# Altium PCB PCB_RFID_Altium.pcbdoc
Units mm, origin at the board's own origin, x right, y up, seen from the top; angles counter-clockwise.
Board outline 159.52 x 95.12 mm, 2 copper layers (Top Layer, Bottom Layer); 3 components, 34 nets, 54 pads, 0 vias.
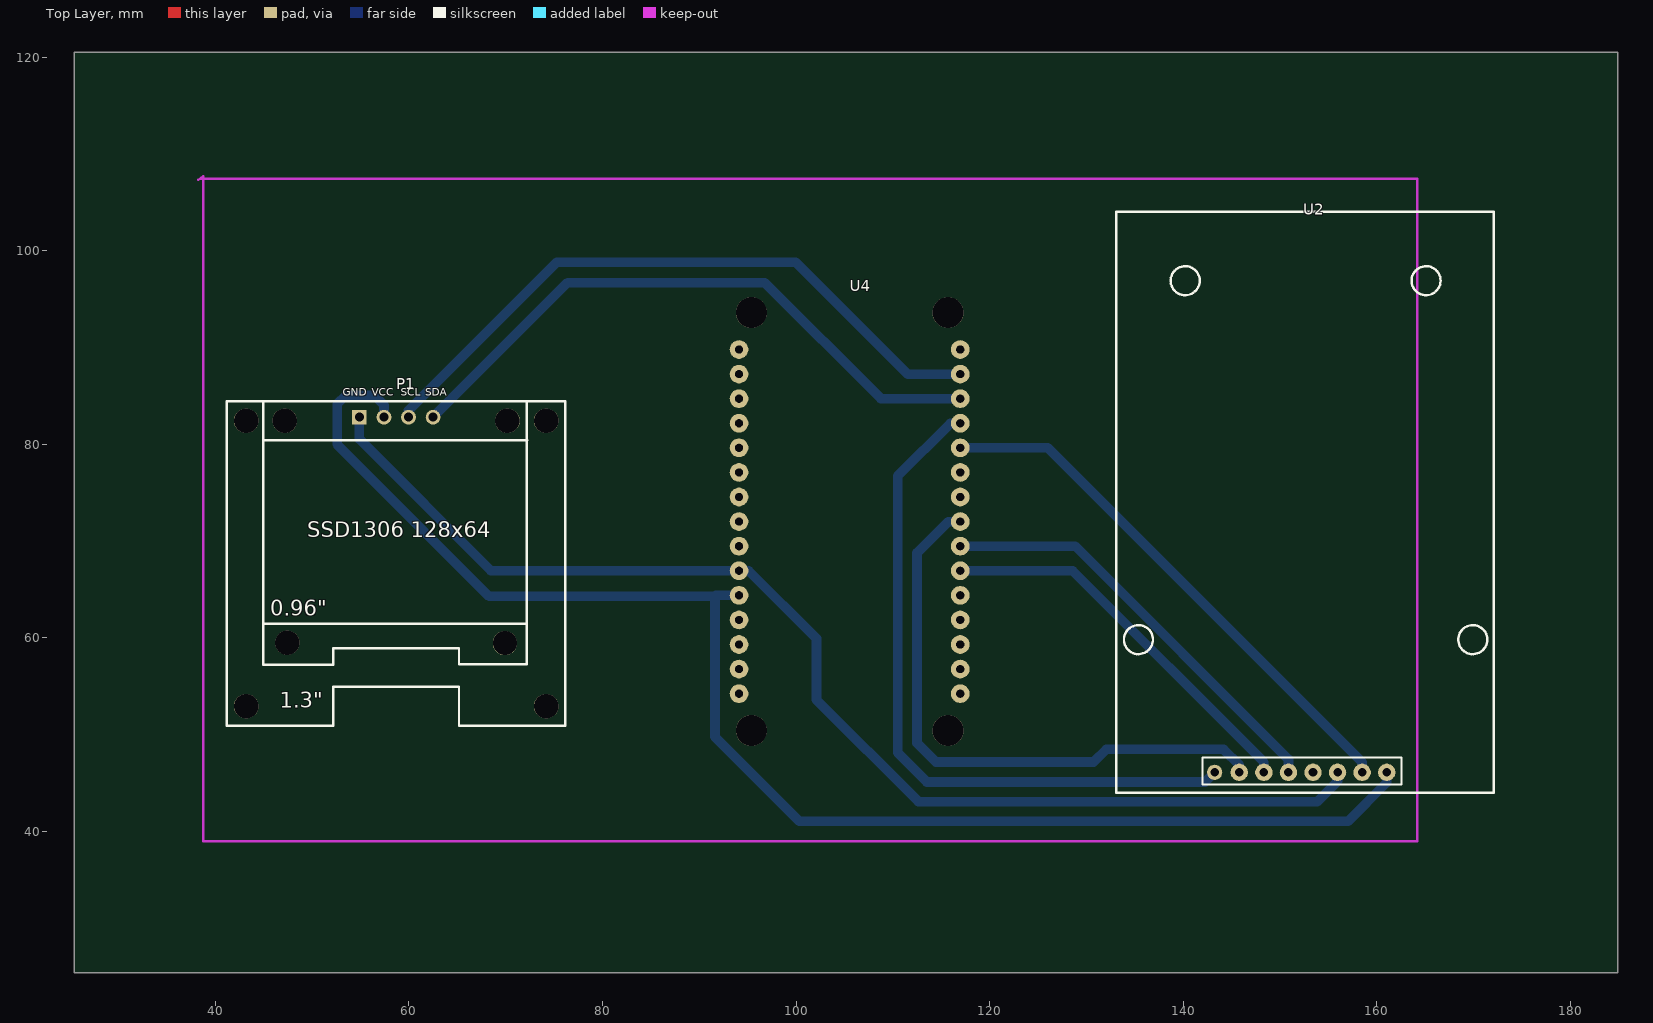
[diagram p0: Top Layer view]
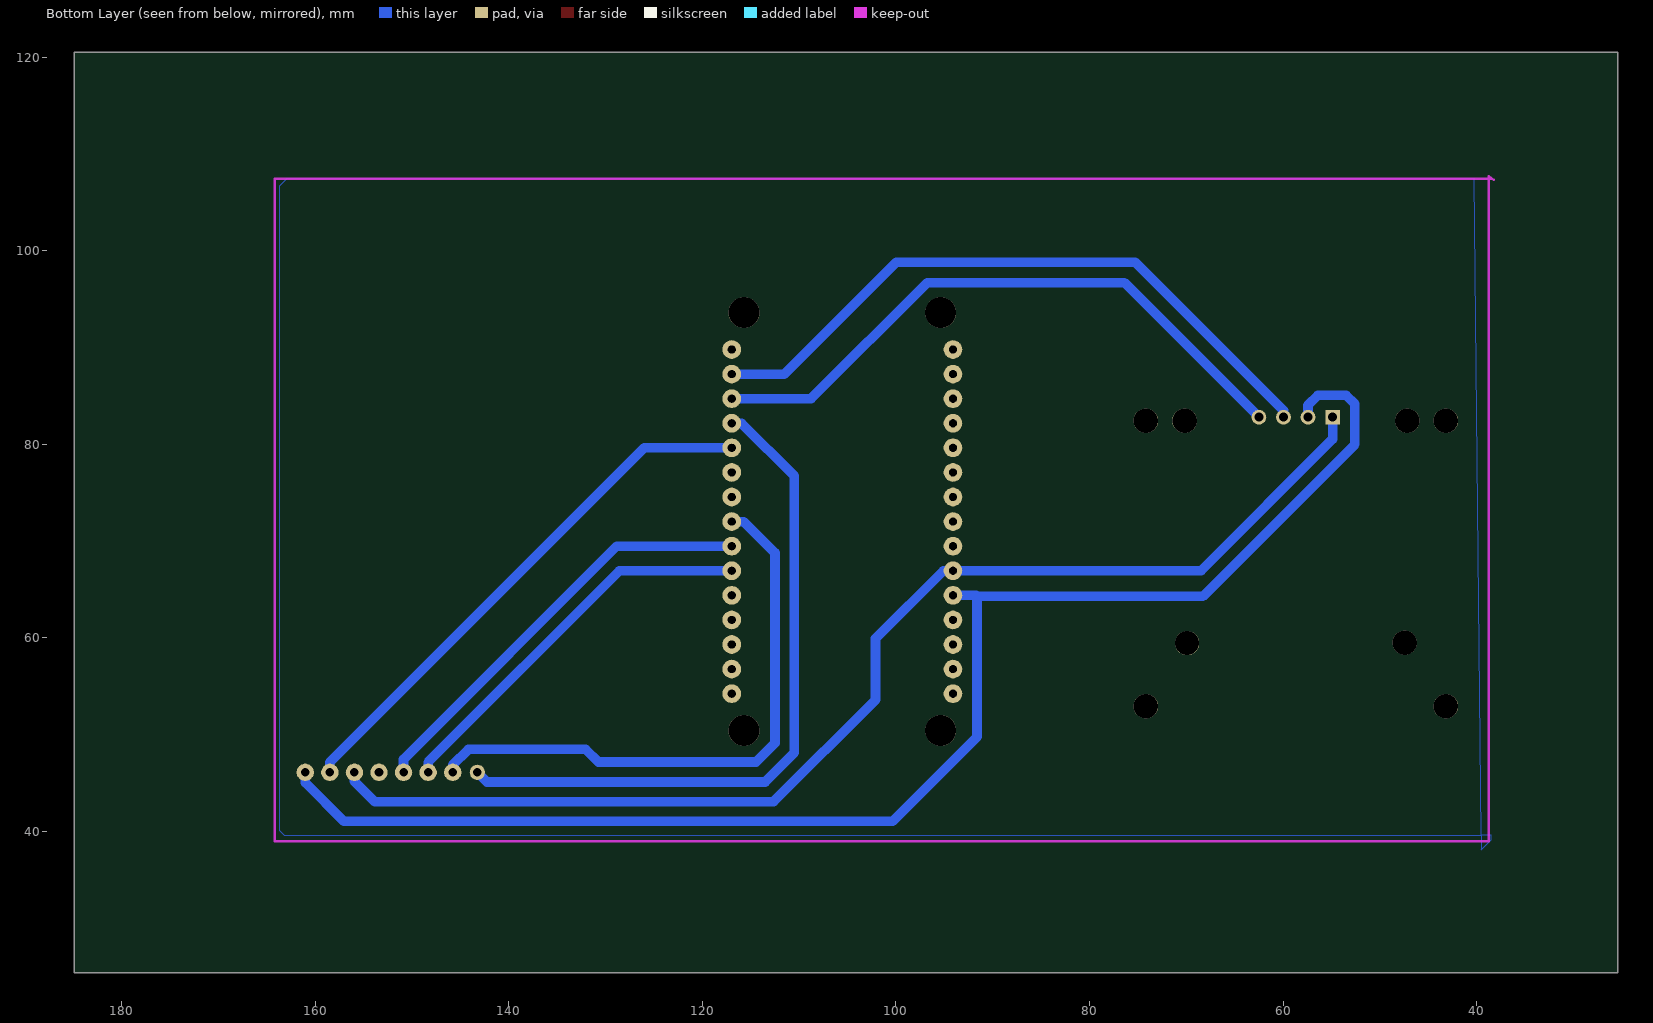
[diagram p1: Bottom Layer view, seen from below]

## Layer stack, top to bottom
Top Layer: signal copper (thickness not stored)
Dielectric: dielectric 0.32, FR-4, Dk 4.8
Bottom Layer: signal copper (thickness not stored)

## Board outline
184.923,25.4 25.4,25.4 25.4,120.523 184.923,120.523

## Components (designator, comment, footprint, x,y, rotation, side; value= is the part's Value field where it differs from the comment)
P1 "COIN_OLED_Display_I2C" "0.96 AND 1.3 I2C OLED SSD1306 COIN" 58.674,82.931 r0 top
U2 "MFRC522" MFRC522 133.096,104.013 r0 top
U4 "ESP8266" ESP12E_DEVKIT-V1 105.537,72.009 r0 top

## Footprints (in the part's own frame and the unit in brackets; to place one, negate y for a bottom-side part, rotate by r counter-clockwise, add the part's x,y. Pads: shape width x height; smd on the part's side, far side on the other; paste and mask are expansions set on the pad)
"0.96 AND 1.3 I2C OLED SSD1306 COIN" [mil]
  rect 60x60 hole 36 paste+0 mask+2: 1(-149.44,-5.18)
  round 60 hole 36 paste+0 mask+2: 2(-49.4,-5.2) 3(50.6,-5.2) 4(150.6,-5.2)
  round 100 hole 100 unplated paste+0: ""(-610.23,-1181.1) ""(-610.23,-19.69) ""(-452.75,-19.69) ""(452.76,-19.69) ""(610.24,-1181.1) ""(610.24,-19.69)
  round 98.43 hole 98.43 unplated paste+0: ""(-442.52,-922.84) ""(442.52,-924.41)
  silkscreen extent -689,-1260 689,59
ESP12E_DEVKIT-V1 [mil]
  round 76 hole 31.5 slot 31.7 at 0 deg paste+0 mask+4: 1(450,-700) 2(450,-600) 3(450,-500) 4(450,-400) 5(450,-300) 6(450,-200) 7(450,-100) 8(450,0) 9(450,100) 10(450,200) 11(450,300) 12(450,400) 13(450,500) 14(450,600) 15(450,700) 16(-450,700) 17(-450,600) 18(-450,500) 19(-450,400) 20(-450,300) 21(-450,200) 22(-450,100) 23(-450,0) 24(-450,-100) 25(-450,-200) 26(-450,-300) 27(-450,-400) 28(-450,-500) 29(-450,-600) 30(-450,-700)
  round 125.98 hole 125.98 unplated paste+0: ""(-400,-850) ""(-400,850) ""(400,-850) ""(400,850)
MFRC522 [mil]
  round 62 hole 35 paste+0 mask+4: 1(400,-2280)
  round 70.87 hole 35 paste+0 mask+4: 2(500,-2280) 3(600,-2280) 4(700,-2280) 5(800,-2280) 6(900,-2280) 7(1000,-2280) 8(1100,-2280)
  silkscreen extent 0,-2362 1535,0

## Nets (pads, with @x,y where several pads share a name; then routed paths per layer and width w, separated by ;. In a path a pad name is that pad's centre, name@x,y a point inside that pad or via, vN(x,y) a via of type N, cw(c..) or ccw(c..) an arc to the next point about the centre after c; other vN are vias at no path point)
GND: P1.1 U2.6 U4.25 | length 124.4
  Bottom Layer w1: P1.1 54.878,80.537 68.486,66.929 U4.25 95.098,66.929 102.107,59.921 102.107,53.595 112.636,43.065 153.858,43.065 155.956,45.163 U2.6
P1_3: P1.3 U4.14 | length 68.8
  Bottom Layer w1: P1.3 59.959,83.488 75.293,98.822 99.959,98.822 111.532,87.249 U4.14
P1_4: P1.4 U4.13 | length 65.2
  Bottom Layer w1: P1.4 76.401,96.701 96.765,96.701 108.756,84.709 U4.13
S$76: 
S$78: 
S$80: 
U2_1: U2.1 U4.12 | length 71.7
  Bottom Layer w1: U4.12 115.957,82.169 110.499,76.712 110.499,48.126 113.522,45.104 142.259,45.104 U2.1
U2_2: U2.2 U4.8 | length 61.5
  Bottom Layer w1: U4.8 115.733,72.009 112.506,68.781 112.506,49.124 114.456,47.174 130.743,47.174 132.053,48.483 144.172,48.483 145.796,46.859 U2.2
U2_3: U2.3 U4.6 | length 40.6
  Bottom Layer w1: U4.6 128.557,66.929 148.336,47.15 U2.3
U2_4: U2.4 U4.7 | length 44.4
  Bottom Layer w1: U4.7 128.849,69.469 150.876,47.442 U2.4
U2_5: U2.5
U2_7: U2.7 U4.11 | length 56
  Bottom Layer w1: U4.11 126.017,79.629 158.496,47.15 U2.7
U4_1: U4.1
U4_2: U4.2
U4_3: U4.3
U4_4: U4.4
U4_5: U4.5
U4_9: U4.9
U4_10: U4.10
U4_15: U4.15
U4_16: U4.16
U4_17: U4.17
U4_18: U4.18
U4_19: U4.19
U4_20: U4.20
U4_21: U4.21
U4_22: U4.22
U4_23: U4.23
U4_24: U4.24
U4_27: U4.27
U4_28: U4.28
U4_29: U4.29
U4_30: U4.30
VCC: P1.2 U2.8 U4.26 | length 149.4
  Bottom Layer w1: P1.2 57.419,84.041 56.397,85.064 53.493,85.064 52.589,84.16 52.589,79.995 68.299,64.285 91.63,64.285 ; U4.26 91.733,64.389 91.63,64.285 ; U2.8 161.036,45.032 157.047,41.043 100.358,41.043 91.63,49.771 91.63,64.285
pads on no net: P1. U4.

## Polygon pours and split planes (outlines as drawn)
GND on Bottom Layer (solid): 39.514,39.624 39.497,38.1 38.481,39.116 38.481,39.624 39.514,39.624
GND on Bottom Layer (solid): 163.703,40.132 163.195,39.624 39.514,39.624 40.259,107.442 162.941,107.442 163.703,106.68 163.703,40.132

## Text inside footprints (layer, text, board x,y; h text height)
P1: Top Overlay "VCC" at 56.174,85.031 h0.8; Top Overlay "GND" at 53.174,85.031 h0.8; Top Overlay "SCL" at 59.174,85.031 h0.8; Top Overlay "SDA" at 61.674,85.031 h0.8; Top Overlay "SSD1306 128x64" at 49.474,70.399 h1.6; Top Overlay "0.96\"" at 45.674,62.258 h1.6; Top Overlay "1.3\"" at 46.672,52.761 h1.6
U4: Document "AD0" at 95.377,89.789 h0.81; Document "RSV" at 95.377,87.249 h0.81; Document "RSV" at 95.377,84.709 h0.81; Document "SD3" at 95.377,82.169 h0.81; Document "SD2" at 95.377,79.629 h0.81; Document "SD1" at 95.377,77.089 h0.81; Document "CMD" at 95.377,74.549 h0.81; Document "SD0" at 95.377,72.009 h0.81; Document "CLK" at 95.377,69.469 h0.81; Document "GND" at 95.377,66.929 h0.81; Document "3V3" at 95.377,64.389 h0.81; Document "EN" at 95.377,61.849 h0.81; Document "RST" at 95.377,59.309 h0.81; Document "GND" at 95.377,56.769 h0.81; Document "VIN" at 95.377,54.229 h0.81; Document "3V3" at 113.502,54.229 h0.81; Document "GND" at 113.502,56.769 h0.81; Document "TX" at 114.234,59.309 h0.81; Document "RX" at 114.234,61.849 h0.81; Document "D8" at 113.502,64.389 h0.81; Document "D7" at 113.502,66.929 h0.81; Document "D6" at 113.502,69.469 h0.81; Document "D5" at 113.502,72.009 h0.81; Document "GND" at 113.502,74.549 h0.81; Document "3V3" at 113.502,77.089 h0.81; Document "D4" at 113.502,79.629 h0.81; Document "D3" at 113.502,82.169 h0.81; Document "D2" at 113.502,84.709 h0.81; Document "D1" at 113.502,87.249 h0.81; Document "D0" at 113.665,89.446 h0.81